# Altium PCB PCB.PcbDoc
Units mm, origin at the board's own origin, x right, y up, seen from the top; angles counter-clockwise.
Board outline 152.4 x 101.6 mm, 2 copper layers (Top Layer, Bottom Layer); 161 components, 117 nets, 497 pads, 5 vias.
Unrouted connection lines stored in the file: 350.
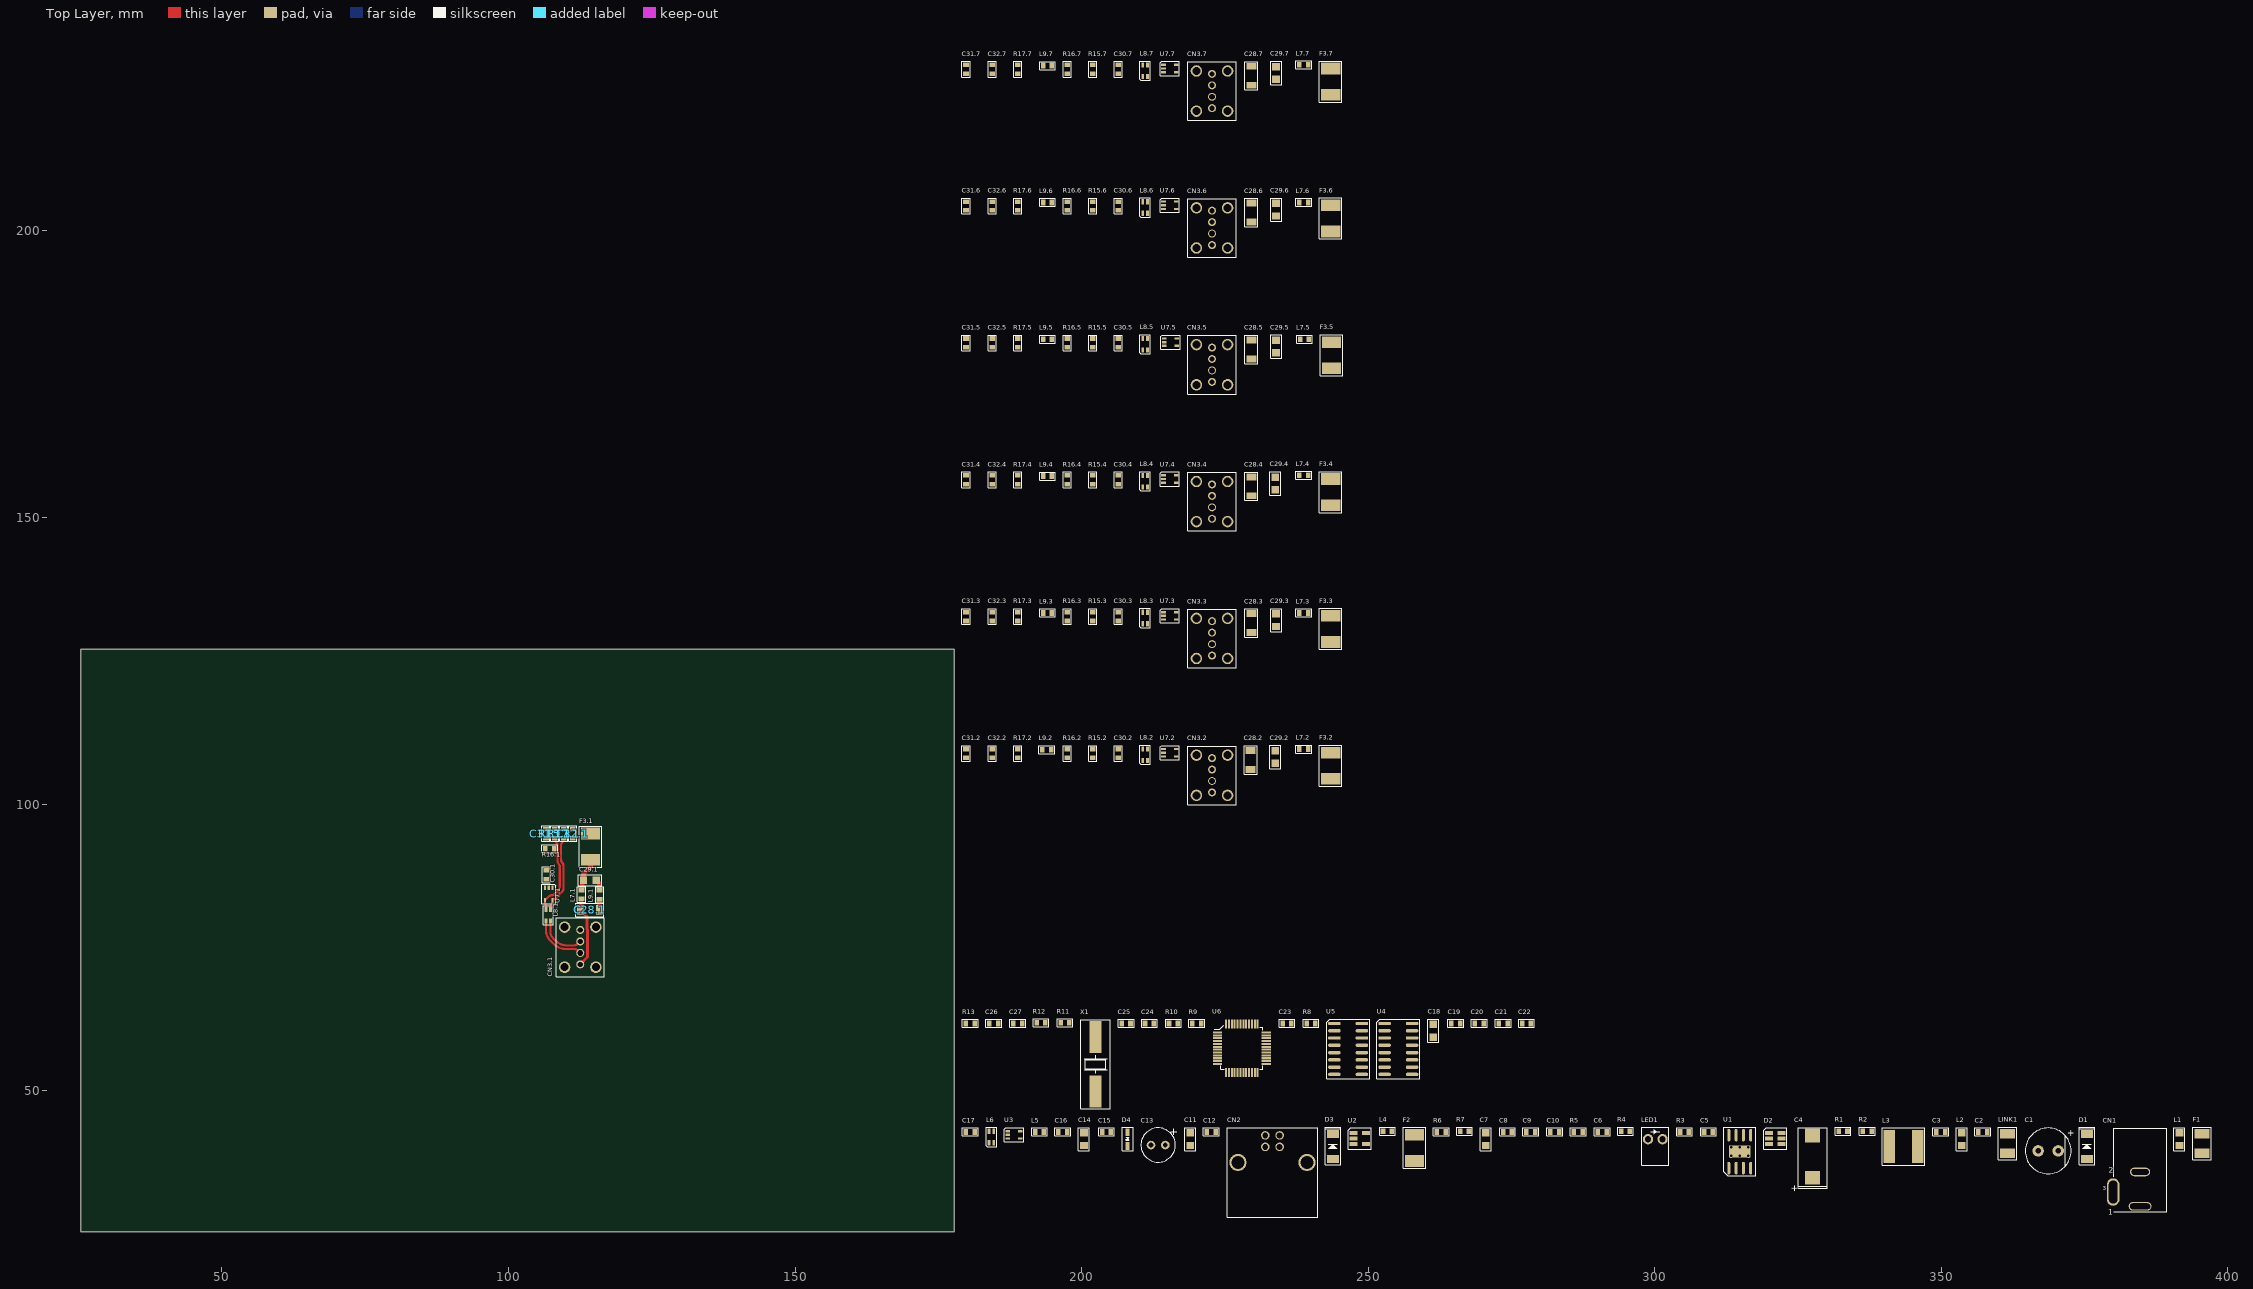
[diagram p0: Top Layer view]
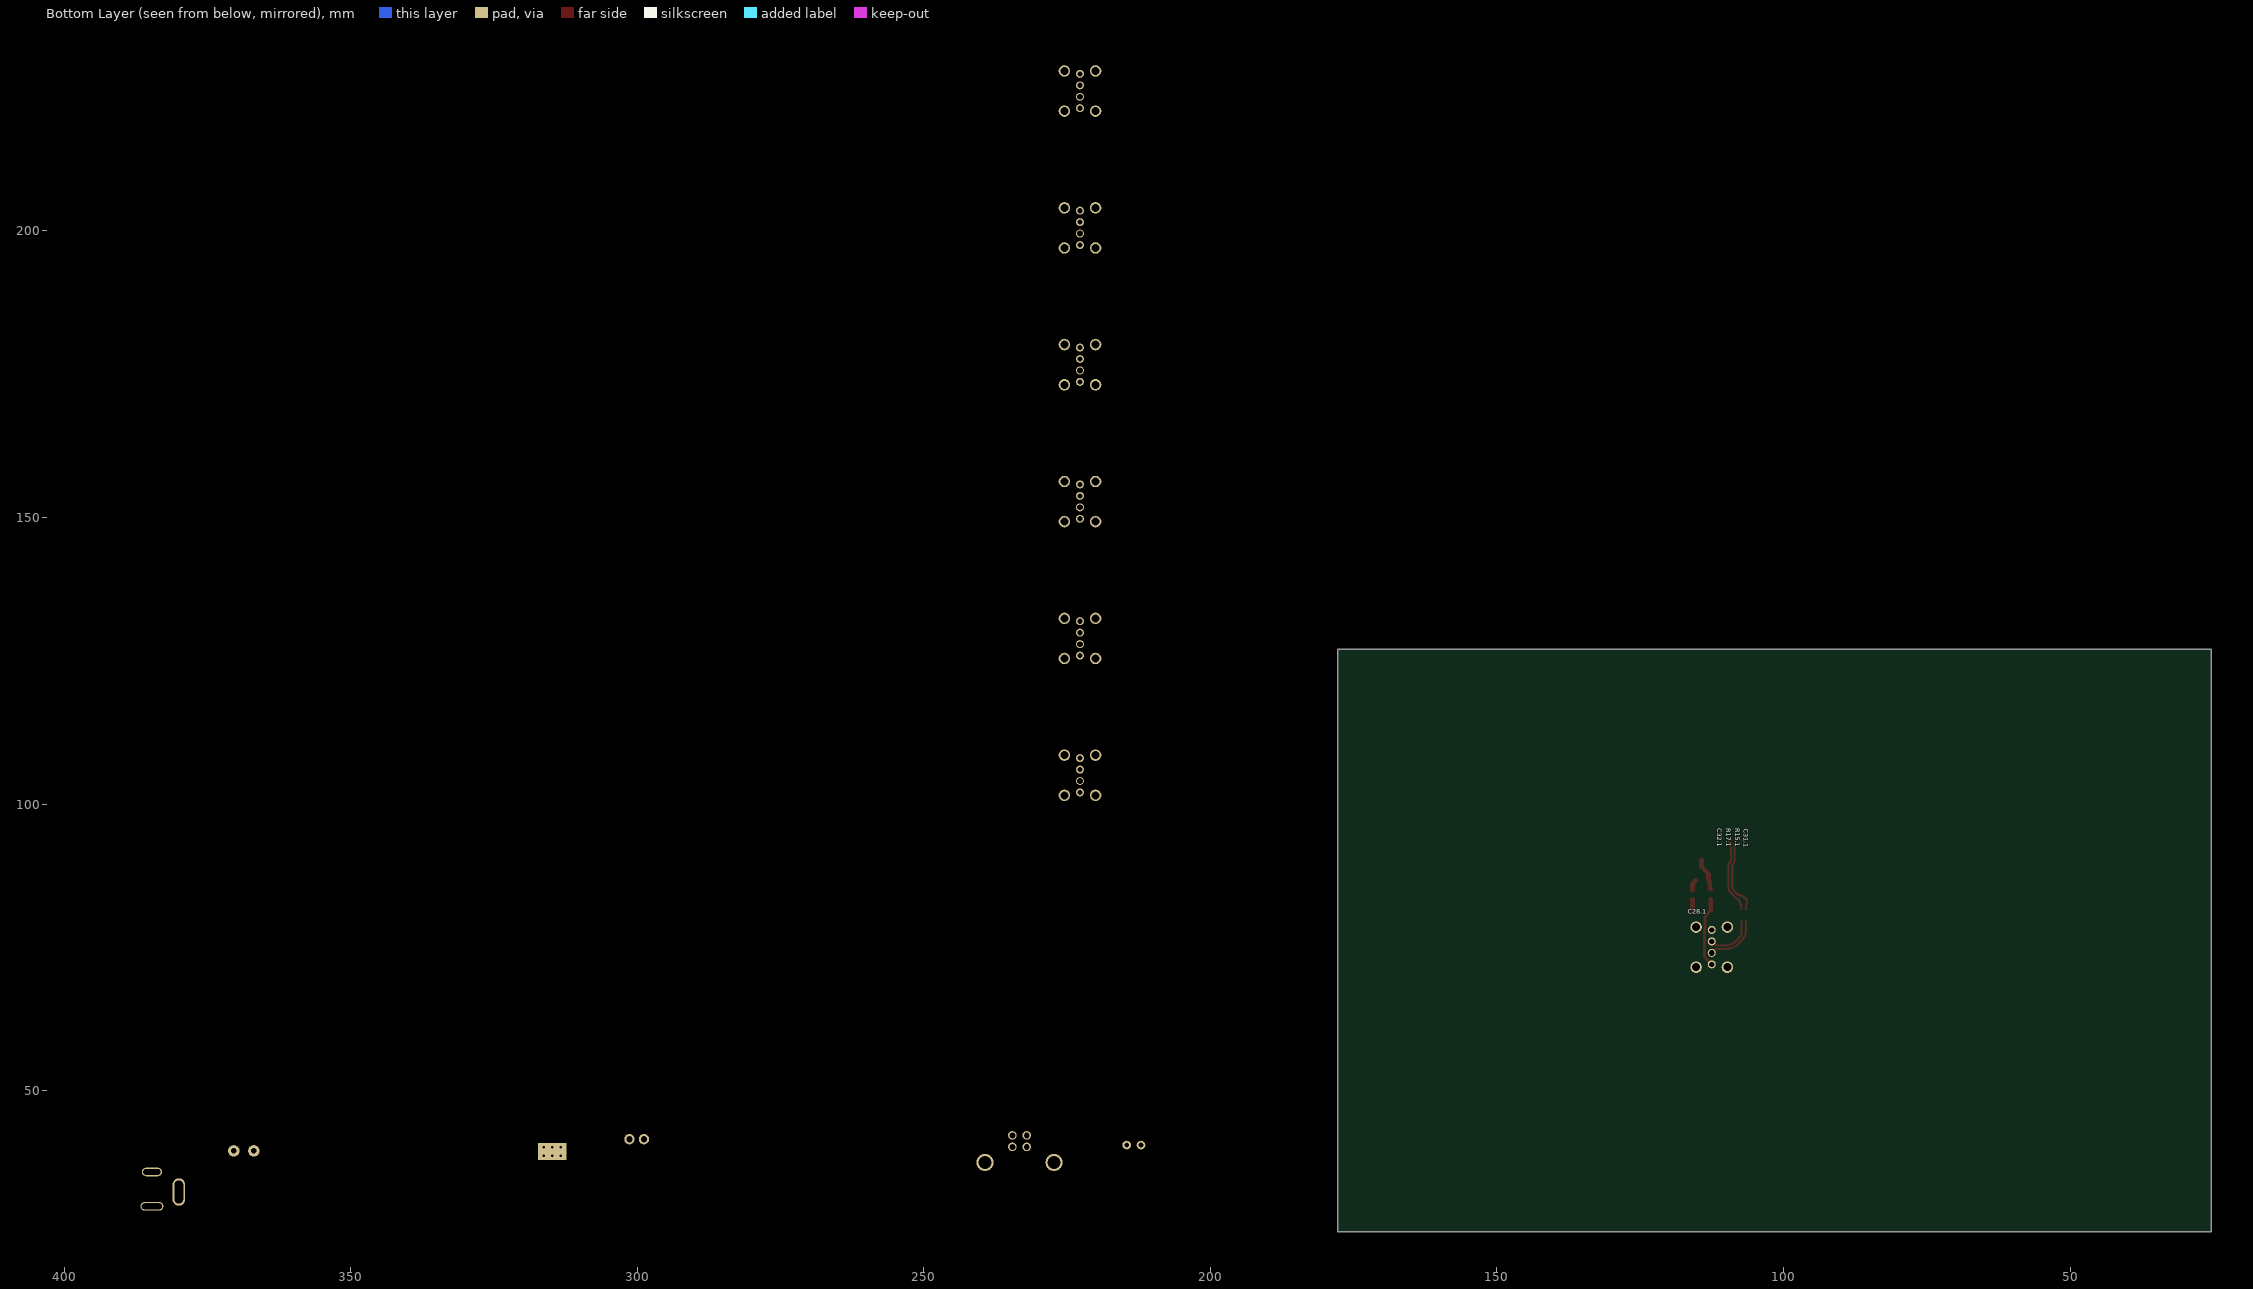
[diagram p1: Bottom Layer view, seen from below]

## Layer stack, top to bottom
Top Solder: solder mask 0.0102, Solder Resist, Dk 3.5
Top Layer: signal copper 0.0356
Dielectric 1: dielectric 0.32, FR-4, Dk 4.8
Bottom Layer: signal copper 0.0356
Bottom Solder: solder mask 0.0102, Solder Resist, Dk 3.5

## Board outline
25.4,25.4 177.8,25.4 177.8,127 25.4,127

## Design rules (kind name [scope] priority, off if disabled: settings)
Clearance [All] p1: gap=0.254 ignorepadtopadclearanceinfootprint=FALSE except(0: Arc-Hole Track-Hole SMDPad-Hole THPad-Hole Via-Hole Fill-Hole Poly-Hole Region-Hole Text-Hole)
DiffPairsRouting [All] p1: maxlimit=0.254 minlimit=0.254 mostfreqgap=0.254 toplayer_minwidth=0.381 toplayer_maxwidth=0.381 toplayer_prefwidth=0.381 bottomlayer_minwidth=0.381 bottomlayer_maxwidth=0.381 bottomlayer_prefwidth=0.381 maxuncoupledlength=12.7
PolygonConnect [All] p1: connectstyle=Relief reliefconductorwidth=0.254 reliefentries=4 polygonreliefangle="90 Angle" airgapwidth=0.254
RoomDefinition USB-Port7 [InComponentClass('USB-Port7')] p1: confinementstyle=ConfineIn formatcopy=TRUE lockcomponents=FALSE outline 178.943,208.661 256.286,208.661 256.286,231.267 178.943,231.267
RoomDefinition USB-Port6 [InComponentClass('USB-Port6')] p2: confinementstyle=ConfineIn formatcopy=TRUE lockcomponents=FALSE outline 178.943,184.785 256.286,184.785 256.286,207.391 178.943,207.391
RoomDefinition USB-Port5 [InComponentClass('USB-Port5')] p3: confinementstyle=ConfineIn formatcopy=TRUE lockcomponents=FALSE outline 178.943,160.909 256.413,160.909 256.413,183.515 178.943,183.515
RoomDefinition USB-Port4 [InComponentClass('USB-Port4')] p4: confinementstyle=ConfineIn formatcopy=TRUE lockcomponents=FALSE outline 178.943,137.033 256.286,137.033 256.286,159.639 178.943,159.639
RoomDefinition USB-Port3 [InComponentClass('USB-Port3')] p5: confinementstyle=ConfineIn formatcopy=TRUE lockcomponents=FALSE outline 178.943,113.157 256.286,113.157 256.286,135.763 178.943,135.763
RoomDefinition USB-Port2 [InComponentClass('USB-Port2')] p6: confinementstyle=ConfineIn formatcopy=TRUE lockcomponents=FALSE outline 178.943,89.281 256.286,89.281 256.286,111.887 178.943,111.887
RoomDefinition USB-Port1 [InComponentClass('USB-Port1')] p7: confinementstyle=ConfineIn formatcopy=TRUE lockcomponents=FALSE outline 105.6,58.822 117.525,58.822 117.525,97.425 105.6,97.425
RoomDefinition U_USB-Hub [InComponentClass('U_USB-Hub')] p8: confinementstyle=ConfineIn formatcopy=TRUE lockcomponents=FALSE outline 178.943,46.482 279.273,46.482 279.273,64.135 178.943,64.135
RoomDefinition "Power Supply" [InComponentClass('Power Supply')] p9: confinementstyle=ConfineIn formatcopy=TRUE lockcomponents=FALSE outline 178.943,26.924 397.256,26.924 397.256,45.212 178.943,45.212
RoutingVias [All] p1: holewidth=0.711 width=1.27 viastyle="Through Hole" minholewidth=0.711 minwidth=1.27 maxholewidth=0.711 maxwidth=1.27
SolderMaskExpansion [All] p1: expansion=0.102
Width [All] p1: maxlimit=5 minlimit=0.254 preferedwidth=0.254
29 further rules are at their usual default settings.

## Classes and differential pairs
net class USB_P[1..7]: USB_P1 USB_P2 USB_P3 USB_P4 USB_P5 USB_P6 USB_P7
net class USB_N[1..7]: USB_N1 USB_N2 USB_N3 USB_N4 USB_N5 USB_N6 USB_N7
component class U_USB-Hub: C18 C19 C20 C21 C22 C23 C24 C25 C26 C27 R8 R9 R10 R11 R12 R13 U4 U5 U6 X1
component class USB-Port1: C28.1 C29.1 C30.1 C31.1 C32.1 CN3.1 F3.1 L7.1 L8.1 L9.1 R13.1 R15.1 R16.1 R17.1 U7.1
component class USB-Port2: C28.2 C29.2 C30.2 C31.2 C32.2 CN3.2 F3.2 L7.2 L8.2 L9.2 R13.2 R15.2 R16.2 R17.2 U7.2
component class USB-Port3: C28.3 C29.3 C30.3 C31.3 C32.3 CN3.3 F3.3 L7.3 L8.3 L9.3 R13.3 R15.3 R16.3 R17.3 U7.3
component class USB-Port4: C28.4 C29.4 C30.4 C31.4 C32.4 CN3.4 F3.4 L7.4 L8.4 L9.4 R13.4 R15.4 R16.4 R17.4 U7.4
component class USB-Port5: C28.5 C29.5 C30.5 C31.5 C32.5 CN3.5 F3.5 L7.5 L8.5 L9.5 R13.5 R15.5 R16.5 R17.5 U7.5
component class USB-Port6: C28.6 C29.6 C30.6 C31.6 C32.6 CN3.6 F3.6 L7.6 L8.6 L9.6 R13.6 R15.6 R16.6 R17.6 U7.6
component class USB-Port7: C28.7 C29.7 C30.7 C31.7 C32.7 CN3.7 F3.7 L7.7 L8.7 L9.7 R13.7 R15.7 R16.7 R17.7 U7.7
channel class USB-Port: USB-Port1 USB-Port2 USB-Port3 USB-Port4 USB-Port5 USB-Port6 USB-Port7
component class "Power Supply": C1 C2 C3 C4 C5 C6 C7 C8 C9 C10 C11 C12 C13 C14 C15 C16 C17 CN1 CN2 D1 D2 D3 D4 F1 F2 L1 L2 L3 L4 L5 L6 LED1 LINK LINK1 R1 R2 R3 R4 R5 R6 R7 U1 U2 U3
net class VBUS[1..7]: VBUS1 VBUS2 VBUS3 VBUS4 VBUS5 VBUS6 VBUS7
differential pair D0: +D0_P -D0_N
differential pair USBO.1: +USBO.1_P -USBO.1_N
differential pair USBO.2: +USBO.2_P -USBO.2_N
differential pair USBO.3: +USBO.3_P -USBO.3_N
differential pair USBO.4: +USBO.4_P -USBO.4_N
differential pair USBO.5: +USBO.5_P -USBO.5_N
differential pair USBO.6: +USBO.6_P -USBO.6_N
differential pair USBO.7: +USBO.7_P -USBO.7_N
differential pair D: +D_P -D_N
differential pair USB0: +USB0_P -USB0_N
differential pair USB.1: +USB.1_P -USB.1_N
differential pair USB.2: +USB.2_P -USB.2_N
differential pair USB.3: +USB.3_P -USB.3_N
differential pair USB.4: +USB.4_P -USB.4_N
differential pair USB.5: +USB.5_P -USB.5_N
differential pair USB.6: +USB.6_P -USB.6_N
differential pair USB.7: +USB.7_P -USB.7_N

## Components (designator, comment, footprint, x,y, rotation, side; value= is the part's Value field where it differs from the comment)
C1 "Capacitor Eletrolítico" CPOLRAD8X14 366.903,39.497 r0 top value=100uF
C2 "Capacitor Cerâmico" CC0603 357.251,42.799 r0 top value=100nF
C3 "Capacitor Cerâmico" CC0603 349.885,42.799 r0 top value=100nF
C4 "Capacitor Tântalo" CPOL2917 327.533,38.481 r90 top value=220uF
C5 "Capacitor Cerâmico" CC0603 309.372,42.799 r0 top value=100nF
C6 "Capacitor Cerâmico" CC0603 290.83,42.799 r0 top value=180pF
C7 "Capacitor Cerâmico" CC0805 270.51,41.529 r90 top value=10uF
C8 "Capacitor Cerâmico" CC0603 274.32,42.799 r0 top value=100nF
C9 "Capacitor Cerâmico" CC0603 278.384,42.799 r0 top value=15nF
C10 "Capacitor Cerâmico" CC0603 282.575,42.799 r0 top value=10pF
C11 "Capacitor Cerâmico" CC0805 218.948,41.529 r90 top value=10uF
C12 "Capacitor Cerâmico" CC0603 222.631,42.799 r0 top value=100nF
C13 "Capacitor Eletrolítico" CPOLRAD6X12 213.36,40.513 r0 top value=470uF
C14 "Capacitor Cerâmico" CC0805 200.406,41.529 r90 top value=10uF
C15 "Capacitor Cerâmico" CC0603 204.343,42.799 r0 top value=100nF
C16 "Capacitor Cerâmico" CC0603 196.723,42.799 r0 top value=10nF
C17 "Capacitor Cerâmico" CC0603 180.594,42.799 r0 top value=470pF
C18 "Capacitor Cerâmico" CC0805 261.366,60.452 r90 top value=10uF
C19 "Capacitor Cerâmico" CC0603 265.303,61.722 r0 top value=100nF
C20 "Capacitor Cerâmico" CC0603 269.367,61.722 r0 top value=100nF
C21 "Capacitor Cerâmico" CC0603 273.558,61.722 r0 top value=100nF
C22 "Capacitor Cerâmico" CC0603 277.622,61.722 r0 top value=100nF
C23 "Capacitor Cerâmico" CC0603 235.839,61.722 r0 top value=100nF
C24 "Capacitor Cerâmico" CC0603 211.836,61.722 r0 top value=100nF
C25 "Capacitor Cerâmico" CC0603 207.772,61.722 r0 top value=10nF
C26 "Capacitor Cerâmico" CC0603 184.658,61.722 r0 top value=27pF
C27 "Capacitor Cerâmico" CC0603 188.849,61.722 r0 top value=27pF
C28.1 "Capacitor Cerâmico" CC1206 114.194,81.526 r180 top value=100uF (schematic designator C28)
C28.2 "Capacitor Cerâmico" CC1206 229.489,107.696 r90 top value=100uF (schematic designator C28)
C28.3 "Capacitor Cerâmico" CC1206 229.616,131.572 r90 top value=100uF (schematic designator C28)
C28.4 "Capacitor Cerâmico" CC1206 229.616,155.448 r90 top value=100uF (schematic designator C28)
C28.5 "Capacitor Cerâmico" CC1206 229.616,179.324 r90 top value=100uF (schematic designator C28)
C28.6 "Capacitor Cerâmico" CC1206 229.616,203.2 r90 top value=100uF (schematic designator C28)
C28.7 "Capacitor Cerâmico" CC1206 229.616,227.076 r90 top value=100uF (schematic designator C28)
C29.1 "Capacitor Cerâmico" CC0805 114.194,86.726 r180 top value=10uF (schematic designator C29)
C29.2 "Capacitor Cerâmico" CC0805 233.807,108.204 r90 top value=10uF (schematic designator C29)
C29.3 "Capacitor Cerâmico" CC0805 233.934,132.08 r90 top value=10uF (schematic designator C29)
C29.4 "Capacitor Cerâmico" CC0805 233.807,155.956 r90 top value=10uF (schematic designator C29)
C29.5 "Capacitor Cerâmico" CC0805 233.934,179.832 r90 top value=10uF (schematic designator C29)
C29.6 "Capacitor Cerâmico" CC0805 233.934,203.708 r90 top value=10uF (schematic designator C29)
C29.7 "Capacitor Cerâmico" CC0805 233.934,227.584 r90 top value=10uF (schematic designator C29)
C30.1 "Capacitor Cerâmico" CC0603 106.6,87.65 r270 top value=470pF (schematic designator C30)
C30.2 "Capacitor Cerâmico" CC0603 206.375,108.839 r90 top value=470pF (schematic designator C30)
C30.3 "Capacitor Cerâmico" CC0603 206.375,132.715 r90 top value=470pF (schematic designator C30)
C30.4 "Capacitor Cerâmico" CC0603 206.375,156.591 r90 top value=470pF (schematic designator C30)
C30.5 "Capacitor Cerâmico" CC0603 206.375,180.467 r90 top value=470pF (schematic designator C30)
C30.6 "Capacitor Cerâmico" CC0603 206.375,204.343 r90 top value=470pF (schematic designator C30)
C30.7 "Capacitor Cerâmico" CC0603 206.375,228.219 r90 top value=470pF (schematic designator C30)
C31.1 "Capacitor Cerâmico" CC0603 106.55,94.85 r90 top value=OPEN (schematic designator C31)
C31.2 "Capacitor Cerâmico" CC0603 179.832,108.839 r90 top value=OPEN (schematic designator C31)
C31.3 "Capacitor Cerâmico" CC0603 179.832,132.715 r90 top value=OPEN (schematic designator C31)
C31.4 "Capacitor Cerâmico" CC0603 179.832,156.591 r90 top value=OPEN (schematic designator C31)
C31.5 "Capacitor Cerâmico" CC0603 179.832,180.467 r90 top value=OPEN (schematic designator C31)
C31.6 "Capacitor Cerâmico" CC0603 179.832,204.343 r90 top value=OPEN (schematic designator C31)
C31.7 "Capacitor Cerâmico" CC0603 179.832,228.219 r90 top value=OPEN (schematic designator C31)
C32.1 "Capacitor Cerâmico" CC0603 111.225,94.85 r90 top value=OPEN (schematic designator C32)
C32.2 "Capacitor Cerâmico" CC0603 184.404,108.839 r90 top value=OPEN (schematic designator C32)
C32.3 "Capacitor Cerâmico" CC0603 184.404,132.715 r90 top value=OPEN (schematic designator C32)
C32.4 "Capacitor Cerâmico" CC0603 184.404,156.591 r90 top value=OPEN (schematic designator C32)
C32.5 "Capacitor Cerâmico" CC0603 184.404,180.467 r90 top value=OPEN (schematic designator C32)
C32.6 "Capacitor Cerâmico" CC0603 184.404,204.343 r90 top value=OPEN (schematic designator C32)
C32.7 "Capacitor Cerâmico" CC0603 184.404,228.219 r90 top value=OPEN (schematic designator C32)
CN1 "Jack-3Pol" CONN_JACK-FONTE_3N 384.683,35.814 r0 top value="Receptáculo - 3Pol"
CN2 "USB B" CONN_USB-B_RCPT-H 233.299,35.052 r0 top value=Receptáculo
CN3.1 "USB A" "CONN_USB-A_RCPT-V - AMP FCI" 112.53,75.035 r90 top value="Gold Plated" (schematic designator CN3)
CN3.2 "USB A" "CONN_USB-A_RCPT-V - AMP FCI" 222.758,105.029 r90 top value="Gold Plated" (schematic designator CN3)
CN3.3 "USB A" "CONN_USB-A_RCPT-V - AMP FCI" 222.758,128.905 r90 top value="Gold Plated" (schematic designator CN3)
CN3.4 "USB A" "CONN_USB-A_RCPT-V - AMP FCI" 222.758,152.781 r90 top value="Gold Plated" (schematic designator CN3)
CN3.5 "USB A" "CONN_USB-A_RCPT-V - AMP FCI" 222.758,176.657 r90 top value="Gold Plated" (schematic designator CN3)
CN3.6 "USB A" "CONN_USB-A_RCPT-V - AMP FCI" 222.758,200.533 r90 top value="Gold Plated" (schematic designator CN3)
CN3.7 "USB A" "CONN_USB-A_RCPT-V - AMP FCI" 222.758,224.409 r90 top value="Gold Plated" (schematic designator CN3)
D1 "PMEG3050EP" SOD-128 375.412,40.259 r90 top value="Vf=360mV @ 5A"
D2 "ZLLS2000" SOT-23-6N 321.056,41.656 r0 top
D3 "PMEG3050EP" SOD-128 243.84,40.259 r90 top value="Vf=360mV @ 5A"
D4 "CDSOD323-T03SC" "SOD-323 BIDIRECT" 208.026,41.529 r90 top value=200pF@1MHz
F1 "Thermistor" CC1210 395.478,40.767 r90 top
F2 "Thermistor" CC1812 258.064,40.005 r90 top
F3.1 "Thermistor" CC1812 114.325,92.575 r270 top (schematic designator F3)
F3.2 "Thermistor" CC1812 243.459,106.68 r90 top (schematic designator F3)
F3.3 "Thermistor" CC1812 243.459,130.556 r90 top (schematic designator F3)
F3.4 "Thermistor" CC1812 243.459,154.432 r90 top (schematic designator F3)
F3.5 "Thermistor" CC1812 243.586,178.308 r90 top (schematic designator F3)
F3.6 "Thermistor" CC1812 243.459,202.184 r90 top (schematic designator F3)
F3.7 "Thermistor" CC1812 243.459,226.06 r90 top (schematic designator F3)
L1 "Bead" CC0805 391.541,41.529 r90 top value=100R@100MHz
L2 "Bead" CC0805 353.568,41.529 r90 top value=100R@100MHz
L3 "Indutor" NR2424 343.408,40.259 r0 top value=3uH
L4 "Bead" CC0603 253.365,42.926 r0 top value=1K@100MHz
L5 "Bead" CC0603 192.659,42.799 r0 top value=1K@100MHz
L6 "ACM2012-900-2P" TR0805-4N 184.277,41.91 r90 top value=90R@100MHz
L7.1 "Bead" CC0603 112.75,84.225 r90 top value=1K@100MHz (schematic designator L7)
L7.2 "Bead" CC0603 238.76,109.601 r0 top value=1K@100MHz (schematic designator L7)
L7.3 "Bead" CC0603 238.76,133.35 r0 top value=1K@100MHz (schematic designator L7)
L7.4 "Bead" CC0603 238.76,157.353 r0 top value=1K@100MHz (schematic designator L7)
L7.5 "Bead" CC0603 238.887,181.102 r0 top value=1K@100MHz (schematic designator L7)
L7.6 "Bead" CC0603 238.76,204.978 r0 top value=1K@100MHz (schematic designator L7)
L7.7 "Bead" CC0603 238.76,228.981 r0 top value=1K@100MHz (schematic designator L7)
L8.1 "ACM2012-900-2P" TR0805-4N 106.95,80.6 r270 top value=90R@100MHz (schematic designator L8)
L8.2 "ACM2012-900-2P" TR0805-4N 211.074,108.585 r90 top value=90R@100MHz (schematic designator L8)
L8.3 "ACM2012-900-2P" TR0805-4N 211.074,132.461 r90 top value=90R@100MHz (schematic designator L8)
L8.4 "ACM2012-900-2P" TR0805-4N 211.074,156.337 r90 top value=90R@100MHz (schematic designator L8)
L8.5 "ACM2012-900-2P" TR0805-4N 211.074,180.213 r90 top value=90R@100MHz (schematic designator L8)
L8.6 "ACM2012-900-2P" TR0805-4N 211.074,204.089 r90 top value=90R@100MHz (schematic designator L8)
L8.7 "ACM2012-900-2P" TR0805-4N 211.074,227.965 r90 top value=90R@100MHz (schematic designator L8)
L9.1 "Bead" CC0603 115.894,84.176 r90 top value=1K@100MHz (schematic designator L9)
L9.2 "Bead" CC0603 193.929,109.474 r0 top value=1K@100MHz (schematic designator L9)
L9.3 "Bead" CC0603 194.056,133.35 r0 top value=1K@100MHz (schematic designator L9)
L9.4 "Bead" CC0603 194.056,157.226 r0 top value=1K@100MHz (schematic designator L9)
L9.5 "Bead" CC0603 194.056,181.102 r0 top value=1K@100MHz (schematic designator L9)
L9.6 "Bead" CC0603 194.056,204.978 r0 top value=1K@100MHz (schematic designator L9)
L9.7 "Bead" CC0603 194.056,228.854 r0 top value=1K@100MHz (schematic designator L9)
LED1 "LED" LED-INDIC 300.101,41.529 r0 top value=Green
LINK1 "Resistor Open" CC1210 361.569,40.767 r90 top value=OPEN
R1 "Resistor" CC0603 332.867,42.926 r0 top value=62K
R2 "Resistor" CC0603 337.058,42.926 r0 top value=470R
R3 "Resistor" CC0603 305.181,42.799 r0 top value=11K8
R4 "Resistor" CC0603 294.894,42.926 r0 top value=Rx
R5 "Resistor" CC0603 286.639,42.799 r0 top value=1M
R6 "Resistor" CC0603 262.763,42.799 r0 top value=Rx
R7 "Resistor" CC0603 266.827,42.926 r0 top value=75K
R8 "Resistor" CC0603 240.03,61.722 r0 top value=10K
R9 "Resistor" CC0603 220.091,61.722 r0 top value=10K
R10 "Resistor" CC0603 216.027,61.722 r0 top value=10K
R11 "Resistor" CC0603 197.104,61.849 r0 top value=22R
R12 "Resistor" CC0603 192.913,61.849 r0 top value=1K5
R13 "Resistor" CC0603 180.594,61.722 r0 top value=22R
R15.1 "Resistor" CC0603 108.1,94.85 r90 top value=22R (schematic designator R15)
R15.2 "Resistor" CC0603 201.93,108.839 r90 top value=22R (schematic designator R15)
R15.3 "Resistor" CC0603 201.93,132.715 r90 top value=22R (schematic designator R15)
R15.4 "Resistor" CC0603 201.93,156.591 r90 top value=22R (schematic designator R15)
R15.5 "Resistor" CC0603 201.93,180.467 r90 top value=22R (schematic designator R15)
R15.6 "Resistor" CC0603 201.93,204.343 r90 top value=22R (schematic designator R15)
R15.7 "Resistor" CC0603 201.93,228.219 r90 top value=22R (schematic designator R15)
R16.1 "Resistor" CC0603 107.225,92.225 r0 top value=15K (schematic designator R16)
R16.2 "Resistor" CC0603 197.485,108.839 r90 top value=15K (schematic designator R16)
R16.3 "Resistor" CC0603 197.485,132.715 r90 top value=15K (schematic designator R16)
R16.4 "Resistor" CC0603 197.485,156.591 r90 top value=15K (schematic designator R16)
R16.5 "Resistor" CC0603 197.485,180.467 r90 top value=15K (schematic designator R16)
R16.6 "Resistor" CC0603 197.485,204.343 r90 top value=15K (schematic designator R16)
R16.7 "Resistor" CC0603 197.485,228.219 r90 top value=15K (schematic designator R16)
R17.1 "Resistor" CC0603 109.65,94.85 r90 top value=22R (schematic designator R17)
R17.2 "Resistor" CC0603 188.849,108.839 r90 top value=22R (schematic designator R17)
R17.3 "Resistor" CC0603 188.849,132.715 r90 top value=22R (schematic designator R17)
R17.4 "Resistor" CC0603 188.849,156.591 r90 top value=22R (schematic designator R17)
R17.5 "Resistor" CC0603 188.849,180.467 r90 top value=22R (schematic designator R17)
R17.6 "Resistor" CC0603 188.849,204.343 r90 top value=22R (schematic designator R17)
R17.7 "Resistor" CC0603 188.849,228.219 r90 top value=22R (schematic designator R17)
U1 "TPS54332" SOIC-8N-EP 314.833,39.37 r90 top
U2 "TPS79333DBVR" SOT-23-5N 248.539,41.656 r0 top
U3 "SP3003-02JTG" SC70-5N 188.214,42.291 r0 top value=0.65pF
U4 "TPS2044" SOIC-16N 255.27,57.277 r0 top
U5 "TPS2044" SOIC-16N 246.507,57.277 r0 top
U6 "TUSB2077A" TQFP-48N 227.965,57.404 r0 top
U7.1 "SP3003-02JTG" SC70-5N 107.025,84.3 r270 top value=0.65pF (schematic designator U7)
U7.2 "SP3003-02JTG" SC70-5N 215.392,108.966 r0 top value=0.65pF (schematic designator U7)
U7.3 "SP3003-02JTG" SC70-5N 215.392,132.842 r0 top value=0.65pF (schematic designator U7)
U7.4 "SP3003-02JTG" SC70-5N 215.392,156.718 r0 top value=0.65pF (schematic designator U7)
U7.5 "SP3003-02JTG" SC70-5N 215.519,180.594 r0 top value=0.65pF (schematic designator U7)
U7.6 "SP3003-02JTG" SC70-5N 215.392,204.47 r0 top value=0.65pF (schematic designator U7)
U7.7 "SP3003-02JTG" SC70-5N 215.392,228.346 r0 top value=0.65pF (schematic designator U7)
X1 "6Mhz" HC/49US 202.438,54.61 r90 top value=20pF/40R

## Footprints (in the part's own frame and the unit in brackets; to place one, negate y for a bottom-side part, rotate by r counter-clockwise, add the part's x,y. Pads: shape width x height; smd on the part's side, far side on the other; paste and mask are expansions set on the pad)
CC0603 [mm] "Chip Resistor, 2-Leads, Body 1,6x0,8mm, IPC Medium Density"
  rect 0.8x1 smd: 1(-0.77,0) 2(0.77,0)
  silkscreen extent -1.38,-0.7 1.38,0.7, body extent -0.8,-0.42 0.8,0.43, height 0.45
CC0805 [mm] "Chip Resistor, 2-Leads, Body 2,0x1,2mm, IPC Medium Density"
  rect 1.3x1.35 smd: 1(-1.1,0) 2(1.1,0)
  silkscreen extent -2.05,-0.95 2.02,0.95, body extent -1,-0.62 1,0.63, height 0.6
CC1206 [mm] "Chip Resistor, 2-Leads, Body 3,2x1,6mm, IPC Medium Density"
  rect 1.2x1.75 smd: 1(-1.65,0) 2(1.65,0)
  silkscreen extent -2.47,-1.15 2.47,1.15, body extent -1.6,-0.8 1.6,0.8, height 1
CC1210 [mm] "Chip Resistor, 2-Leads, Body 3,2x2,5mm, IPC Medium Density"
  rect 1.65x2.65 smd: 1(-1.715,0) 2(1.715,0)
  silkscreen extent -2.85,-1.6 2.85,1.6, body extent -1.6,-1.25 1.6,1.25, height 1.3
CC1812 [mm] "Chip Resistor, 2-Leads, Body 4,5x3,2mm, IPC Medium Density"
  rect 2.03x3.35 smd: 1(-2.286,0) 2(2.286,0)
  silkscreen extent -3.57,-1.95 3.57,1.95, body extent -2.27,-1.63 2.28,1.63, height 3.2
CONN_JACK-FONTE_3N [mm]
  oval 4x1.5 hole 1 slot 3.5 at 0 deg: 1(0,-6)
  oval 3.5x1.5 hole 1 slot 3 at 0 deg: 2(0,0)
  oval 2.2x4.8 hole 1.5 slot 4 at 90 deg: 3(-4.7,-3.5)
  silkscreen extent -4.59,-6.94 4.64,7.62, body extent -4.5,-6 4.5,7.73, height 11
"CONN_USB-A_RCPT-V - AMP FCI" [mm] "Conector USB SMD tipo A, Receptáculo (lado)"
  round 1.4 hole 0.9: 1(-3,0) 3(1,0) 4(3,0)
  round 1.4 hole 1: 2(-1,0)
  round 2 hole 1.4: 5(3.5,-2.72) 5(3.5,2.72) 6(-3.5,-2.72) 6(-3.5,2.72)
  silkscreen extent -5.13,-4.2 5.1,4.2, body extent -15.53,-3.56 4.17,3.56, height 3.16
CONN_USB-B_RCPT-H [mm] "Conector USB SMD tipo B, Macho"
  round 1.5 hole 1: 1(1.25,7.135) 2(-1.25,7.135) 3(-1.25,5.135) 4(1.25,5.135)
  round 3 hole 2.3: 5(6.02,2.425) 6(-6.02,2.425)
  silkscreen extent -7.87,-7.11 7.87,8.49, body extent -7.45,-7.96 7.35,8.54, height 11
CPOL2917 [mm] "Molded Capacitor, 2-Leads, Body 7,3x4,3mm, IPC Medium Density"
  rect 2.4x2.6 smd: 1(-3.683,0) 2(3.683,0)
  silkscreen extent -5.53,-2.52 5.08,2.52, body extent -3.75,-2.25 3.75,2.25, height 4.31
CPOLRAD6X12 [mm]
  round 1.5 hole 0.8: 1(1.25,0) 2(-1.25,0)
  silkscreen extent -3,-3 3.24,3, body extent -2.98,-3.01 3,2.98, height 12
CPOLRAD8X14 [mm]
  round 2 hole 1: 1(3.5,0) 2(0,0)
  silkscreen extent -2.25,-4 5.75,4, body extent -2.35,-4.1 5.85,4.1, height 14.4
HC/49US [mm] "Crystal, 2-Leads, Body 11,5x4,7mm, IPC Low Density"
  rect 5.6x2.1 smd: 1(-4.75,0) 2(4.75,0)
  silkscreen extent -7.77,-2.58 7.78,2.58, body extent -6.15,-2.25 6.15,2.25, height 5.18
LED-INDIC [mm]
  round 1.8 hole 1.1: 1(-1.27,0) 2(1.27,0)
  silkscreen extent -2.4,-4.51 2.38,2.07, body extent -2.3,-6.81 2.3,1.95, height 7.3
NR2424 [mm] "Power Wire Wound Inductor, 2-Leads, Body 6,0x6,0mm, IPC Medium Density"
  rect 2x5.7 smd: 1(-2.5,0) 2(2.5,0)
  silkscreen extent -3.67,-3.25 3.67,3.25, body extent -3,-3 3,3, height 1.2
SC70-5N [mm] "SOT23, 5-Leads, Body 2,3x2,4mm (max), Pitch 0,65mm, IPC Medium Density"
  rect 0.8x0.4 smd: 1(-1.1,0.65) 2(-1.1,0) 3(-1.1,-0.65) 4(1.1,-0.65) 5(1.1,0.65)
  silkscreen extent -1.69,-1.24 1.69,1.25, body extent -0.67,-1.12 0.67,1.13, height 1.1
SOD-128 [mm] "Molded Diode, 2-Leads, Body 3,8x2,4mm, IPC High Density"
  rect 1.4x2.1 smd: 1(-2.2,0) 2(2.2,0)
  silkscreen extent -3.15,-1.35 3.35,1.35, body extent -1.95,-1.25 1.95,1.25, height 0.9
"SOD-323 BIDIRECT" [mm] "Molded TVS Diode, 2-Leads, Body 1,7x1,3mm, IPC Medium Density,"
  rect 1.35x0.65 smd: 1(-1.2,0) 2(1.2,0)
  silkscreen extent -2.05,-0.95 2.04,0.95, body extent -1.28,-0.68 1.42,0.67, height 0.79
SOIC-8N-EP [mm] "SOIC, 8-Leads, Body 4.9x3.9mm, Pitch 1.27mm, IPC Medium Density"
  oval 2.2x0.5 smd: 1(-2.875,1.905) 2(-2.875,0.635) 3(-2.875,-0.635) 4(-2.875,-1.905) 5(2.875,-1.905) 6(2.875,-0.635) 7(2.875,0.635) 8(2.875,1.905)
  rect 2.13x3.8 / inner rect 2.94x4.89 / far side rect 2.94x4.89 hole 0.4 copper offset 0.75,0: 9(-0.75,0)
  silkscreen extent -4.24,-2.8 4.23,2.8, body extent -2,-2.5 2,2.5, height 1.75
SOIC-16N [mm] "SOIC, 16-Leads, Body 9,9x3,9mm (max), Pitch 1,27mm, IPC Medium Density"
  oval 2.2x0.6 smd: 1(-2.4,4.445) 2(-2.4,3.175) 3(-2.4,1.905) 4(-2.4,0.635) 5(-2.4,-0.635) 6(-2.4,-1.905) 7(-2.4,-3.175) 8(-2.4,-4.445) 9(2.4,-4.445) 10(2.4,-3.175) 11(2.4,-1.905) 12(2.4,-0.635) 13(2.4,0.635) 14(2.4,1.905) 15(2.4,3.175) 16(2.4,4.445)
  silkscreen extent -3.74,-5.19 3.74,5.19, body extent -3.04,-5 3.04,5, height 1.65
SOT-23-5N [mm] "SOT23, 5-Leads, Body 3,1x2,7mm (max), Pitch 0,95mm, IPC Medium Density"
  rect 1.4x0.7 smd: 1(-1.1,0.95) 2(-1.1,0) 3(-1.1,-0.95) 4(1.1,-0.95) 5(1.1,0.95)
  silkscreen extent -2.01,-1.86 2,1.86, body extent -1.4,-1.45 1.4,1.45, height 1.09
SOT-23-6N [mm] "SOT23, 6-Leads, Body 3,1x2,7mm (max), Pitch 0,95mm, IPC Medium Density"
  rect 1.4x0.7 smd: 1(-1.1,0.95) 2(-1.1,0) 3(-1.1,-0.95) 4(1.1,-0.95) 5(1.1,0) 6(1.1,0.95)
  silkscreen extent -2.01,-1.86 2,1.86, body extent -1.5,-1.5 1.5,1.5, height 1.4
TQFP-48N [mm] "TQFP, 48-Leads, Body 9x9mm (max), Pitch 0,50mm, IPC High Density"
  rect 1.6x0.35 smd: 1(-4.25,2.75) 2(-4.25,2.25) 3(-4.25,1.75) 4(-4.25,1.25) 5(-4.25,0.75) 6(-4.25,0.25) 7(-4.25,-0.25) 8(-4.25,-0.75) 9(-4.25,-1.25) 10(-4.25,-1.75) 11(-4.25,-2.25) 12(-4.25,-2.75) 25(4.25,-2.75) 26(4.25,-2.25) 27(4.25,-1.75) 28(4.25,-1.25) 29(4.25,-0.75) 30(4.25,-0.25) 31(4.25,0.25) 32(4.25,0.75) 33(4.25,1.25) 34(4.25,1.75) 35(4.25,2.25) 36(4.25,2.75)
  rect 0.35x1.6 smd: 13(-2.75,-4.25) 14(-2.25,-4.25) 15(-1.75,-4.25) 16(-1.25,-4.25) 17(-0.75,-4.25) 18(-0.25,-4.25) 19(0.25,-4.25) 20(0.75,-4.25) 21(1.25,-4.25) 22(1.75,-4.25) 23(2.25,-4.25) 24(2.75,-4.25) 37(2.75,4.25) 38(2.25,4.25) 39(1.75,4.25) 40(1.25,4.25) 41(0.75,4.25) 42(0.25,4.25) 43(-0.25,4.25) 44(-0.75,4.25) 45(-1.25,4.25) 46(-1.75,4.25) 47(-2.25,4.25) 48(-2.75,4.25)
  silkscreen extent -4.86,-3.65 3.65,3.98, body extent -4.5,-4.5 4.5,4.5, height 1.6
TR0805-4N [mm] "Precision Wire Wound Inductor, 4-Leads, Body 2,0x1,2mm, IPC High Density"
  rect 0.9x0.5 smd: 1(-1,0.4) 2(-1,-0.4) 3(1,-0.4) 4(1,0.4)
  silkscreen extent -1.67,-0.9 1.67,0.9, body extent -1.1,-0.7 1.1,0.7, height 1.3

## Part data
C1: library part "PCap 100uF 25V 8d.x14h.", "Polarized Capacitor (Radial)", Supplier Part Number 1=493-4496-1-ND, Tolerância=±20%, ChinesePrice=0,00000, Chinês=----, ComponentLink1Description=Datasheet, ComponentLink1URL=D:\Tecnoclade\Datasheet\!DataMissing.pdf, Corrente=*A, Obs=Alumínio, Potência=*W, Supplier 1=Digi-Key, Tensão=25V
C2 C3 C5 C12 C15 C19 C20 C21 C22 C23 C24: library part "Cap 100nF 50V 0603 X7R", "Capacitor (Semiconductor SIM Model)", Supplier Part Number 1=1276-1000-1-ND, Tolerância=±10%, ChinesePrice=0,00250, Chinês=Local, ComponentLink1Description=Datasheet, ComponentLink1URL=D:\Tecnoclade\Datasheet\!DataMissing.pdf, Corrente=*A, Obs=X7R, Potência=*W, Supplier 1=Digi-Key, Tensão=50V
C4: library part "PCap 220uF 6V3 2917 LOESR", "Polarized Capacitor", Supplier Part Number 1=1189-1687-1-ND, Tolerância=±20%, ChinesePrice=0,28500, Chinês=Local, ComponentLink1Description=Datasheet, ComponentLink1URL=D:\Tecnoclade\Datasheet\!DataMissing.pdf, Corrente="3.5A (Ripple)", Obs="LOESR (0R009)", Potência=*W, Supplier 1=Digi-Key, Tensão=6V3
C6: library part "Cap 180pF 50V 0603 NP0", "Capacitor (Semiconductor SIM Model)", Supplier Part Number 1=1276-1255-1-ND, Tolerância=±5%, ChinesePrice=0,00360, Chinês=Local, ComponentLink1Description=Datasheet, ComponentLink1URL=D:\Tecnoclade\Datasheet\!DataMissing.pdf, Corrente=*A, Obs=NP0, Potência=*W, Supplier 1=Digi-Key, Tensão=50V
C7 C11 C14 C18 C29.1 C29.2 C29.3 C29.4 C29.5 C29.6 C29.7: library part "Cap 10uF 25V 0805 X5R", "Capacitor (Semiconductor SIM Model)", Supplier Part Number 1=587-2985-1-ND, Tolerância=±10%, ChinesePrice=0,02620, Chinês=Local, ComponentLink1Description=Datasheet, ComponentLink1URL=D:\Tecnoclade\Datasheet\!DataMissing.pdf, Corrente=*A, Obs=X5R, Potência=*W, Supplier 1=Digi-Key, Tensão=25V
C8: library part "Cap 100nF 25V 0603 X7R", "Capacitor (Semiconductor SIM Model)", Supplier Part Number 1=490-1524-1-ND, Tolerância=±10%, ChinesePrice=0,00246, Chinês=Local, ComponentLink1Description=Datasheet, ComponentLink1URL=D:\Tecnoclade\Datasheet\!DataMissing.pdf, Corrente=*A, Obs=X7R, Potência=*W, Supplier 1=Digi-Key, Tensão=25V
C9: library part "Cap 15nF 50V 0603 X7R", "Capacitor (Semiconductor SIM Model)", Supplier Part Number 1=445-5189-1-ND, Tolerância=±10%, ChinesePrice=0,00500, Chinês=Local, ComponentLink1Description=Datasheet, ComponentLink1URL=D:\Tecnoclade\Datasheet\!DataMissing.pdf, Corrente=*A, Obs=X7R, Potência=*W, Supplier 1=Digi-Key, Tensão=50V
C10: library part "Cap 10pF 50V 0603 NP0 5%", "Capacitor (Semiconductor SIM Model)", Supplier Part Number 1=445-1269-1-ND, Tolerância=±5%, ChinesePrice=0,00180, Chinês=Local, ComponentLink1Description=Datasheet, ComponentLink1URL=D:\Tecnoclade\Datasheet\!DataMissing.pdf, Corrente=*A, Obs=NP0, Potência=*W, Supplier 1=Digi-Key, Tensão=50V
C13: library part "PCap 470uF 10V 6d.x12h.", "Polarized Capacitor (Radial)", Supplier Part Number 1=399-6589-ND, Tolerância=±20%, ChinesePrice=0,00000, Chinês=----, ComponentLink1Description=Datasheet, ComponentLink1URL=D:\Tecnoclade\Datasheet\!DataMissing.pdf, Corrente=*A, Obs="ESH477M010AE3AA - Alumínio", Potência=*W, Supplier 1=Digi-Key, Tensão=10V
C16 C25: library part "Cap 10nF 50V 0603 X7R 5%", "Capacitor (Semiconductor SIM Model)", Supplier Part Number 1=399-1092-1-ND, Tolerância=±5%, ChinesePrice=0,00320, Chinês=Local, ComponentLink1Description=Datasheet, ComponentLink1URL=D:\Tecnoclade\Datasheet\!DataMissing.pdf, Corrente=*A, Obs=X7R, Potência=*W, Supplier 1=Digi-Key, Tensão=50V
C17 C30.1 C30.2 C30.3 C30.4 C30.5 C30.6 C30.7: library part "Cap 470pF 50V 0603 X7R", "Capacitor (Semiconductor SIM Model)", Supplier Part Number 1=399-1075-1-ND, Tolerância=±10%, ChinesePrice=0,00180, Chinês=Local, ComponentLink1Description=Datasheet, ComponentLink1URL=D:\Tecnoclade\Datasheet\!DataMissing.pdf, Corrente=*A, Obs=X7R, Potência=*W, Supplier 1=Digi-Key, Tensão=50V
C26 C27: library part "Cap 27pF 50V 0603 NP0", "Capacitor (Semiconductor SIM Model)", Supplier Part Number 1=445-1274-1-ND, Tolerância=±5%, ChinesePrice=0,00000, Chinês=-----, ComponentLink1Description=Datasheet, ComponentLink1URL=D:\Tecnoclade\Datasheet\!DataMissing.pdf, Corrente=*A, Obs=NP0, Potência=*W, Supplier 1=Digi-Key, Tensão=50V
C28.1 C28.2 C28.3 C28.4 C28.5 C28.6 C28.7: library part "Cap 100uF 6.3V 1206 X5R", "Capacitor (Semiconductor SIM Model)", Supplier Part Number 1=490-7217-1-ND, Tolerância=±20%, ChinesePrice=0,00000, Chinês=-----, ComponentLink1Description=Datasheet, ComponentLink1URL=D:\Tecnoclade\Datasheet\!DataMissing.pdf, Corrente=*A, Obs=X5R, Potência=*W, Supplier 1=Digi-Key, Tensão=6.3V
C31.1 C31.2 C31.3 C31.4 C31.5 C31.6 C31.7 C32.1 C32.2 C32.3 C32.4 C32.5 C32.6 C32.7: library part "Cap OPEN 0603", "Capacitor (Semiconductor SIM Model)", Supplier Part Number 1=--Del, Tolerância=±*%, ChinesePrice=0,00000, Chinês=-----, ComponentLink1Description=Datasheet, ComponentLink1URL=D:\Tecnoclade\Datasheet\!DataMissing.pdf, Corrente=*A, Potência=*W, Supplier 1=Digi-Key, Tensão=*V
CN1: "Jack Socket, Thru-Hole, Vertical, 2 Conductors, 3 Contacts Single Switch, Normally Closed", Supplier Part Number 1=CP-202BH-ND, ChinesePrice=0,06600, Chinês=Local, ComponentLink1Description=Datasheet, Corrente=5A, Supplier 1=Digi-Key, Tensão=16VDC
CN2: library part "USB B RCPT-H", "Conector Jack USB B, Through Hole, Right Angle, Horizontal", Supplier Part Number 1=A31725-ND, ChinesePrice=0,00000, Chinês=----, ComponentLink1Description=Datasheet, ComponentLink1URL=D:\Tecnoclade\Datasheet\!DataMissing.pdf, Obs="USB 2.0", Supplier 1=Digi-Key
CN3.1 CN3.2 CN3.3 CN3.4 CN3.5 CN3.6 CN3.7: library part "USB A RCPT-H", "Conector Jack USB A, Through Hole, Horizontal", Supplier Part Number 1=609-1041-ND, ChinesePrice=0,00000, Chinês=----, ComponentLink1Description=Datasheet, Supplier 1=Digi-Key
D1 D3: library part "DS 30V 5A SOD-128", "Schottky Diode", Supplier Part Number 1=568-6753-1-ND, ChinesePrice=0,16100, Chinês=Local, ComponentLink1Description=Datasheet, ComponentLink1URL=D:\Tecnoclade\Datasheet\!DataMissing.pdf, Corrente=5A, Obs="Fast Recovery =< 500ns, > 200mA (Io)", Supplier 1=Digi-Key, Tensão=30V
D2: "Power Shottky", Supplier Part Number 1=ZLLS2000CT-ND, ChinesePrice=0,33990, Chinês=Local, ComponentLink1Description=Datasheet, ComponentLink1URL=D:\Tecnoclade\Datasheet\!DataMissing.pdf, Corrente=2.2A, Supplier 1=Digi-Key, Tensão=40V
D4: library part "TVS 8V 5% SOD323 BI 400W", "Transient Voltage Supressor diode", Supplier Part Number 1=CDSOD323-T03SCCT-ND, Tolerância=±*%, ChinesePrice=0,00000, Chinês=----, ComponentLink1Description=Datasheet, ComponentLink1URL=D:\Tecnoclade\Datasheet\!DataMissing.pdf, Corrente=43A, Obs=Bidirecional, Potência=400W, Supplier 1=Digi-Key, Tensão=8V
F1: library part "Res Varistor", "Varistor (Voltage-Sensitive Resistor)", Supplier Part Number 1=507-1792-1-ND, ChinesePrice=0,09500, Chinês=Local, ComponentLink1Description=Datasheet, ComponentLink1URL=D:\Tecnoclade\Datasheet\!DataMissing.pdf, Corrente=2A, Obs="TRIP: 4A", Supplier 1=Digi-Key, Tensão=15V
F2 F3.1 F3.2 F3.3 F3.4 F3.5 F3.6 F3.7: library part "Res Varistor", "Varistor (Voltage-Sensitive Resistor)", Supplier Part Number 1=507-1762-1-ND, ChinesePrice=0,09500, Chinês=Local, ComponentLink1Description=Datasheet, ComponentLink1URL=D:\Tecnoclade\Datasheet\!DataMissing.pdf, Corrente=500mA, Obs="TRIP: 1A", Supplier 1=Digi-Key, Tensão=15V
L1 L2: library part "Bd 180R@100MHz 1806 3A", Supplier Part Number 1=445-1567-1-ND, Tolerância=±*%, ChinesePrice=0,00000, Chinês=-----, ComponentLink1Description=Datasheet, ComponentLink1URL=D:\Tecnoclade\Datasheet\!DataMissing.pdf, Corrente=4A, Obs="Ferrite (0R025)", Supplier 1=Digi-Key
L3: library part "Ind 3uH 2424 3.6A", "Inductor", Supplier Part Number 1=587-2099-1-ND, Tolerância=±30%, ChinesePrice=0,00000, Chinês=----, ComponentLink1Description=Datasheet, ComponentLink1URL=D:\Tecnoclade\Datasheet\!DataMissing.pdf, Corrente=3.6A, Obs=(0R023)@100MHz, Supplier 1=Digi-Key
L4 L5 L7.1 L7.2 L7.3 L7.4 L7.5 L7.6 L7.7 L9.1 L9.2 L9.3 L9.4 L9.5 L9.6 L9.7: library part "Bd 1K@100MHz 0603 400mA", Supplier Part Number 1=445-1550-1-ND, Tolerância=±25%, ChinesePrice=0,00000, Chinês=-----, ComponentLink1Description=Datasheet, ComponentLink1URL=D:\Tecnoclade\Datasheet\!DataMissing.pdf, Corrente=400mA, Obs="Ferrite (0R5)", Substituição=27/06/2014, Supplier 1=Digi-Key
L6 L8.1 L8.2 L8.3 L8.4 L8.5 L8.6 L8.7: "Indutor de Modo Comum", Supplier Part Number 1=445-2207-1-ND, Tolerância=±*%, ChinesePrice=0,19100, Chinês=Local, ComponentLink1Description=Datasheet, ComponentLink1URL=D:\Tecnoclade\Datasheet\!DataMissing.pdf, Corrente=400mA, Obs=Z=0R19, Potência=*W, Substituição=00/00/0000, Supplier 1=Digi-Key, Tensão=*V
LED1: library part LED2, "Typical RED, GREEN, YELLOW, AMBER GaAs LED", Supplier Part Number 1=754-1297-ND, ChinesePrice=0,00000, Chinês=----, Supplier 1=Digi-Key, VertSimCode="} XXXXX {"
LINK1: library part "Res Open 0603", "Resistor", Supplier Part Number 1=--Del, Tolerância=±*%, ChinesePrice=0,00000, Chinês=----, ComponentLink1Description=Datasheet, ComponentLink1URL=D:\Tecnoclade\Datasheet\!DataMissing.pdf, Corrente=*A, Potência=*W, Supplier 1=Digi-Key, Tensão=*V
R1: library part "Res 62K 1% 0603 1/10W", Supplier Part Number 1=311-62.0KHRCT-ND, Tolerância=±1%, ChinesePrice=0,00089, Chinês=Local, ComponentLink1Description=Datasheet, ComponentLink1URL=D:\Tecnoclade\Datasheet\!DataMissing.pdf, Corrente=*A, Potência=1/10W, Supplier 1=Digi-Key, Tensão=*V
R2: library part "Res 470R 5% 0603 1/10W", Supplier Part Number 1=RMCF0603JT470RCT-ND, Tolerância=±5%, ChinesePrice=0,00000, Chinês=----, ComponentLink1Description=Datasheet, ComponentLink1URL=D:\Tecnoclade\Datasheet\!DataMissing.pdf, Corrente=*A, Obs=±200ppm/ºC, Potência=1/10W, Supplier 1=Digi-Key, Tensão=*V
R3: library part "Res 11K8 1% 0603 1/10W", Supplier Part Number 1=311-11.8KHRCT-ND, Tolerância=±1%, ChinesePrice=0,00089, Chinês=Local, ComponentLink1Description=Datasheet, ComponentLink1URL=D:\Tecnoclade\Datasheet\!DataMissing.pdf, Corrente=*A, Potência=1/10W, Supplier 1=Digi-Key, Tensão=*V
R4: library part "Res 150K 1% 0603 1/10W", Supplier Part Number 1=P150KHCT-ND, Tolerância=±1%, ChinesePrice=0,00089, Chinês=Local, ComponentLink1Description=Datasheet, ComponentLink1URL=D:\Tecnoclade\Datasheet\!DataMissing.pdf, Corrente=*A, Potência=1/10W, Supplier 1=Digi-Key, Tensão=*V
R5: library part "Res 1M 1% 0603 1/10W", Supplier Part Number 1=RMCF0603FT1M00CT-ND, Tolerância=±1%, ChinesePrice=0,00089, Chinês=Local, ComponentLink1Description=Datasheet, ComponentLink1URL=D:\Tecnoclade\Datasheet\!DataMissing.pdf, Corrente=*A, Obs=±100ppm/ºC, Potência=1/10W, Supplier 1=Digi-Key, Tensão=*V
R6: library part "Res 48K7 1% 0603 1/10W", Supplier Part Number 1=P48.7KHCT-ND, Tolerância=±1%, ChinesePrice=0,00089, Chinês=Local, ComponentLink1Description=Datasheet, ComponentLink1URL=D:\Tecnoclade\Datasheet\!DataMissing.pdf, Corrente=*A, Potência=1/10W, Supplier 1=Digi-Key, Tensão=*V
R7: library part "Res 75K 1% 0603 1/10W", Supplier Part Number 1=P75.0KHCT-ND, Tolerância=±1%, ChinesePrice=0,00100, Chinês=Local, ComponentLink1Description=Datasheet, ComponentLink1URL=D:\Tecnoclade\Datasheet\!DataMissing.pdf, Corrente=*A, Obs=±100ppm/ºC, Potência=1/10W, Supplier 1=Digi-Key, Tensão=*V
R8 R9 R10: library part "Res 10K 1% 0603 1/10W", Supplier Part Number 1=P10.0KHCT-ND, Tolerância=±1%, ChinesePrice=0,00089, Chinês=Local, ComponentLink1Description=Datasheet, ComponentLink1URL=D:\Tecnoclade\Datasheet\!DataMissing.pdf, Corrente=*A, Potência=1/10W, Supplier 1=Digi-Key, Tensão=*V
R11 R13 R15.1 R15.2 R15.3 R15.4 R15.5 R15.6 R15.7 R17.1 R17.2 R17.3 R17.4 R17.5 R17.6 R17.7: library part "Res 22R 1% 0603 1/10W", Supplier Part Number 1=RMCF0603FT22R0CT-ND, Tolerância=±1%, ChinesePrice=0,00000, Chinês=----, ComponentLink1Description=Datasheet, ComponentLink1URL=D:\Tecnoclade\Datasheet\!DataMissing.pdf, Corrente=*A, Obs=±100ppm/ºC, Potência=1/10W, Supplier 1=Digi-Key, Tensão=*V
R12: library part "Res 1K5 1% 0603 1/10W", Supplier Part Number 1=311-1.50KHRCT-ND, Tolerância=±1%, ChinesePrice=0,00000, Chinês=----, ComponentLink1Description=Datasheet, ComponentLink1URL=D:\Tecnoclade\Datasheet\!DataMissing.pdf, Corrente=*A, Obs=±100ppm/ºC, Potência=1/10W, Supplier 1=Digi-Key, Tensão=*V
R16.1 R16.2 R16.3 R16.4 R16.5 R16.6 R16.7: library part "Res 15K 1% 0603 1/10W", Supplier Part Number 1=RMCF0603FT15K0CT-ND, Tolerância=±1%, ChinesePrice=0,00000, Chinês=-----, ComponentLink1Description=Datasheet, ComponentLink1URL=D:\Tecnoclade\Datasheet\!DataMissing.pdf, Corrente=*A, Obs=±100ppm/ºC, Potência=1/10W, Supplier 1=Digi-Key, Tensão=*V
U1: "DC/DC Converter Step-Down 3.5A 28V", Supplier Part Number 1=296-24141-5-ND, ChinesePrice=0,87200, Chinês=TI, ComponentLink1Description=Datasheet, ComponentLink1URL=D:\Tecnoclade\Datasheet\!DataMissing.pdf, Corrente=3.5A, Supplier 1=Digi-Key
U2: library part TPS79333, "ULTRALOW-NOISE, HIGH PSRR, FAST RF 200mA LOW-DROPOUT LINEAR  REGULATORS I", Supplier Part Number 1=296-12961-1-ND, ChinesePrice=0,00000, Chinês=----, ComponentLink1Description=Datasheet, ComponentLink1URL=D:\Tecnoclade\Datasheet\, Corrente=200mA, Supplier 1=Digi-Key, Tensão=3V3
U3 U7.1 U7.2 U7.3 U7.4 U7.5 U7.6 U7.7: "TVS DIODE ARRAY", Supplier Part Number 1=F3301CT-ND, Supplier 1=Digi-Key, Tensão=6V
U4 U5: "QUAD POWER-DISTRIBUTION SWITCH", Supplier Part Number 1=296-18931-5-ND, ChinesePrice=0,00000, Chinês=----, Supplier 1=Digi-Key, Tensão="2V3 ~ 5V5"
U6: "USB HUB 7 Port", Supplier Part Number 1=296-37871-1-ND, ChinesePrice=0,00000, Chinês=----, ComponentLink1Description=Datasheet, Supplier 1=Digi-Key
X1: library part XTAL, "Crystal Oscillator", Supplier Part Number 1=--Del, ChinesePrice=0,00000, Chinês=----, Supplier 1=Digi-Key

## Via types
v1: diameter 0.7, hole 0.4, Top Layer to Bottom Layer, tented both sides, 5 vias

## Nets (pads, with @x,y where several pads share a name; then routed paths per layer and width w, separated by ;. In a path a pad name is that pad's centre, name@x,y a point inside that pad or via, vN(x,y) a via of type N, cw(c..) or ccw(c..) an arc to the next point about the centre after c; other vN are vias at no path point)
3V3: C14.2 C15.2 C23.2 C24.2 C25.2 R8.2 R9.1 R10.1 U2.5 U6.9 U6.10 U6.46
5V: C4.1 C5.2 C11.2 C12.2 C18.2 C19.2 C20.2 C21.2 C22.2 D3.2 L3.2 LINK1.2 R1.2 R2.2 U2.1 U2.3 U4.2 U4.6 U5.2 U5.6
D0_N: R11.1 U6.4
D0_P: R12.1 R13.1 U6.3
D_N: CN2.2 L6.1
D_P: CN2.3 L6.2
DP0PUR: R12.2 U6.2
GND: C2.1 C4.2 C5.1 C7.1 C8.1 C9.1 C10.1 C11.1 C12.1 C14.1 C15.1 C16.1 C17.1 C18.1 C19.1 C20.1 C21.1 C22.1 C23.1 C24.1 C25.1 C26.1 C27.1 C29.1.1 C29.2.1 C29.3.1 C29.4.1 C29.5.1 C29.6.1 C29.7.1 C30.1.1 C30.2.1 C30.3.1 C30.4.1 C30.5.1 C30.6.1 C30.7.1 C31.1.1 C31.2.1 C31.3.1 C31.4.1 C31.5.1 C31.6.1 C31.7.1 C32.1.1 C32.2.1 C32.3.1 C32.4.1 C32.5.1 C32.6.1 C32.7.1 D2.3 D2.4 L2.2 L5.2 L9.1.2 L9.2.2 L9.3.2 L9.4.2 L9.5.2 L9.6.2 L9.7.2 LED1.2 R3.1 R5.1 R6.1 R7.1 R16.1.1 R16.2.1 R16.3.1 R16.4.1 R16.5.1 R16.6.1 R16.7.1 U1.7 U1.9 U2.2 U3.2 U4.1 U4.5 U5.1 U5.5 U6.5 U6.24 U6.43 U6.48 U7.1.2 U7.2.2 U7.3.2 U7.4.2 U7.5.2 U7.6.2 U7.7.2 | length 2
  Top Layer w0.8: C29.1.1 115.894,86.126 L9.1.2
  other v1: 313.333,38.62 316.333,38.62 313.333,40.12 314.833,40.12 316.333,40.12
NetC1_1: C1.1 D1.2 F1.1 L1.1
NetC1_2: C1.2 CN1.2 D1.1 L2.1
NetC3_1: C3.1 D2.1 D2.2 D2.5 D2.6 L3.1 U1.8
NetC3_2: C3.2 U1.1
NetC6_1: C6.1 R7.2
NetC6_2: C6.2 C10.2 U1.6
NetC9_2: C9.2 R5.2 U1.4
NetC13_1: C13.1 D4.2 F2.1 L4.1
NetC13_2: C13.2 CN2.4 CN2.5 CN2.6 D4.1 L5.1
NetC16_2: C16.2 U2.4
NetC28.1_1: C28.1.1 CN3.1.4 CN3.1.5 CN3.1.6 L9.1.1 | length 1.8
  Top Layer w0.8: C28.1.1@115.894,81.576 L9.1.1
NetC28.1_2: C28.1.2 CN3.1.1 L7.1.1 | length 12.3
  Top Layer w0.5: CN3.1.1 113.8,73.305 113.8,78.132 113.723,78.209 113.723,80.347 C28.1.2@112.694,81.476
  Top Layer w0.8: C28.1.2@112.694,81.476 L7.1.1@112.694,83.381
NetC28.2_1: C28.2.1 CN3.2.4 CN3.2.5 CN3.2.6 L9.2.1
NetC28.2_2: C28.2.2 CN3.2.1 L7.2.1
NetC28.3_1: C28.3.1 CN3.3.4 CN3.3.5 CN3.3.6 L9.3.1
NetC28.3_2: C28.3.2 CN3.3.1 L7.3.1
NetC28.4_1: C28.4.1 CN3.4.4 CN3.4.5 CN3.4.6 L9.4.1
NetC28.4_2: C28.4.2 CN3.4.1 L7.4.1
NetC28.5_1: C28.5.1 CN3.5.4 CN3.5.5 CN3.5.6 L9.5.1
NetC28.5_2: C28.5.2 CN3.5.1 L7.5.1
NetC28.6_1: C28.6.1 CN3.6.4 CN3.6.5 CN3.6.6 L9.6.1
NetC28.6_2: C28.6.2 CN3.6.1 L7.6.1
NetC28.7_1: C28.7.1 CN3.7.4 CN3.7.5 CN3.7.6 L9.7.1
NetC28.7_2: C28.7.2 CN3.7.1 L7.7.1
NetCN1_1: CN1.1 F1.2
NetCN2_1: CN2.1 F2.2
NetD3_1: D3.1 L4.2
NetLED1_1: LED1.1 R2.1
NetR1_1: R1.1 R3.2 U1.5
NetR4_1: R4.1 R6.2 U1.3
NetR8_1: R8.1 U6.47
NetR9_2: R9.2 U6.6
NetR10_2: R10.2 U6.8
OVCR1: U4.16 U6.12
OVCR2: U4.13 U6.16
OVCR3: U4.12 U6.20
OVCR4: U4.10 U6.25
OVCR5: U5.16 U6.29
OVCR6: U5.13 U6.33
OVCR7: U5.12 U6.37
PWR_ON1: U4.3 U6.11
PWR_ON2: U4.4 U6.15
PWR_ON3: U4.7 U6.19
PWR_ON4: U4.8 U6.23
PWR_ON5: U5.3 U6.28
PWR_ON6: U5.4 U6.32
PWR_ON7: U5.7 U6.36
USB0_N: L6.4 R11.2 U3.4
USB0_P: L6.3 R13.2 U3.5
USB.1_N: L8.1.2 R15.1.1 R16.1.2 U7.1.4 | length 14.1
  Top Layer w0.381: L8.1.2 106.55,82.435 cw(c106.972,82.857) 106.375,82.857 U7.1.4 107.056,83.881 cw(c107.585,83.352) 107.585,84.1 ccw(c107.585,84.74) 108.038,84.287 108.65,84.9 ccw(c107.923,85.627) 108.951,85.627 108.951,89.301 cw(c109.901,90.251) 108.558,90.251 108.558,92.975 ccw(c108.421,92.975) 108.518,93.072 cw(c109.526,94.08) R15.1.1
USB.1_P: L8.1.1 R17.1.1 U7.1.5 | length 13.7
  Top Layer w0.381: L8.1.1 107.35,82.24 cw(c107.456,82.24) 107.381,82.316 ccw(c106.672,83.025) 107.675,83.025 U7.1.5 107.885,83.41 108.058,83.41 109.099,84.451 109.4,84.752 ccw(c108.951,85.201) 109.586,85.201 109.586,89.301 ccw(c108.951,89.301) 109.4,89.75 cw(c109.901,90.251) 109.193,90.251 109.193,92.975 cw(c109.329,92.975) 109.232,93.072 ccw(c108.224,94.08) R17.1.1
USB.2_N: L8.2.2 R15.2.1 R16.2.2 U7.2.4
USB.2_P: L8.2.1 R17.2.1 U7.2.5
USB.3_N: L8.3.2 R15.3.1 R16.3.2 U7.3.4
USB.3_P: L8.3.1 R17.3.1 U7.3.5
USB.4_N: L8.4.2 R15.4.1 R16.4.2 U7.4.4
USB.4_P: L8.4.1 R17.4.1 U7.4.5
USB.5_N: L8.5.2 R15.5.1 R16.5.2 U7.5.4
USB.5_P: L8.5.1 R17.5.1 U7.5.5
USB.6_N: L8.6.2 R15.6.1 R16.6.2 U7.6.4
USB.6_P: L8.6.1 R17.6.1 U7.6.5
USB.7_N: L8.7.2 R15.7.1 R16.7.2 U7.7.4
USB.7_P: L8.7.1 R17.7.1 U7.7.5
USB_N1: C31.1.2 R15.1.2 U6.13
USB_N2: C31.2.2 R15.2.2 U6.17
USB_N3: C31.3.2 R15.3.2 U6.21
USB_N4: C31.4.2 R15.4.2 U6.26
USB_N5: C31.5.2 R15.5.2 U6.30
USB_N6: C31.6.2 R15.6.2 U6.34
USB_N7: C31.7.2 R15.7.2 U6.38
USB_P1: C32.1.2 R17.1.2 U6.14
USB_P2: C32.2.2 R17.2.2 U6.18
USB_P3: C32.3.2 R17.3.2 U6.22
USB_P4: C32.4.2 R17.4.2 U6.27
USB_P5: C32.5.2 R17.5.2 U6.31
USB_P6: C32.6.2 R17.6.2 U6.35
USB_P7: C32.7.2 R17.7.2 U6.39
USBO.1_N: CN3.1.2 L8.1.3 | length 9.6
  Top Layer w0.381: L8.1.3 106.55,78.014 ccw(c109.114,78.014) 107.301,76.201 107.855,75.647 ccw(c110.1,77.893) 110.1,74.718 111.5,74.718 cw(c111.5,73.879) 112.093,74.472 CN3.1.2
USBO.1_P: CN3.1.3 L8.1.4 | length 8.5
  Top Layer w0.381: L8.1.4 107.35,77.616 ccw(c108.716,77.616) 107.75,76.65 108.304,76.096 ccw(c110.1,77.893) 110.1,75.353 111.5,75.353 ccw(c111.5,76.191) 112.093,75.598 CN3.1.3
USBO.2_N: CN3.2.2 L8.2.3
USBO.2_P: CN3.2.3 L8.2.4
USBO.3_N: CN3.3.2 L8.3.3
USBO.3_P: CN3.3.3 L8.3.4
USBO.4_N: CN3.4.2 L8.4.3
USBO.4_P: CN3.4.3 L8.4.4
USBO.5_N: CN3.5.2 L8.5.3
USBO.5_P: CN3.5.3 L8.5.4
USBO.6_N: CN3.6.2 L8.6.3
USBO.6_P: CN3.6.3 L8.6.4
USBO.7_N: CN3.7.2 L8.7.3
USBO.7_P: CN3.7.3 L8.7.4
VBUS: C17.2 U3.3
VBUS1: F3.1.1 U4.15
VBUS2: F3.2.1 U4.14
VBUS3: F3.3.1 U4.11
VBUS4: F3.4.1 U4.9
VBUS5: F3.5.1 U5.15
VBUS6: F3.6.1 U5.14
VBUS7: F3.7.1 U5.11
VBUS_F.1: C29.1.2 C30.1.2 F3.1.2 L7.1.2 U7.1.3 | length 6.1
  Top Layer w0.5: L7.1.2@112.544,84.971 L7.1.2@112.85,85.277 ; C29.1.2@112.85,86.482 C29.1.2
  Top Layer w0.8: L7.1.2@112.85,85.277 C29.1.2@112.85,86.482 ; C29.1.2 113.094,87.869 114.325,89.1 F3.1.2
VBUS_F.2: C29.2.2 C30.2.2 F3.2.2 L7.2.2 U7.2.3
VBUS_F.3: C29.3.2 C30.3.2 F3.3.2 L7.3.2 U7.3.3
VBUS_F.4: C29.4.2 C30.4.2 F3.4.2 L7.4.2 U7.4.3
VBUS_F.5: C29.5.2 C30.5.2 F3.5.2 L7.5.2 U7.5.3
VBUS_F.6: C29.6.2 C30.6.2 F3.6.2 L7.6.2 U7.6.3
VBUS_F.7: C29.7.2 C30.7.2 F3.7.2 L7.7.2 U7.7.3
VEXT: C2.2 C7.2 C8.2 L1.2 LINK1.1 R4.2 U1.2
X1: C26.2 U6.45 X1.1
X2: C27.2 U6.44 X1.2
pads on no net: CN1.3 U3.1 U5.8 U5.9 U5.10 U6.1 U6.7 U6.40 U6.41 U6.42 U7.1.1 U7.2.1 U7.3.1 U7.4.1 U7.5.1 U7.6.1 U7.7.1

## Dimensions
105.55,58.775 to 117.525,58.825 on Bottom Overlay

## Text inside footprints (layer, text, board x,y; h text height)
C1: Top Overlay "+" at 371.944,41.59 h2
C4: Top Overlay "+" at 325.409,32.309 h2 r90
CN1: Top Overlay "1" at 379.139,28.031 h1.6; Top Overlay "2" at 379.238,35.33 h1.6; Top Overlay "3" at 378.172,32.364 h1.2